# Altium PCB FlybackPCB.PcbDoc
Units mm, origin at the board's own origin, x right, y up, seen from the top; angles counter-clockwise.
Board outline 80 x 52 mm, 2 copper layers (Top Layer, Bottom Layer); 24 components, 15 nets, 77 pads, 0 vias.
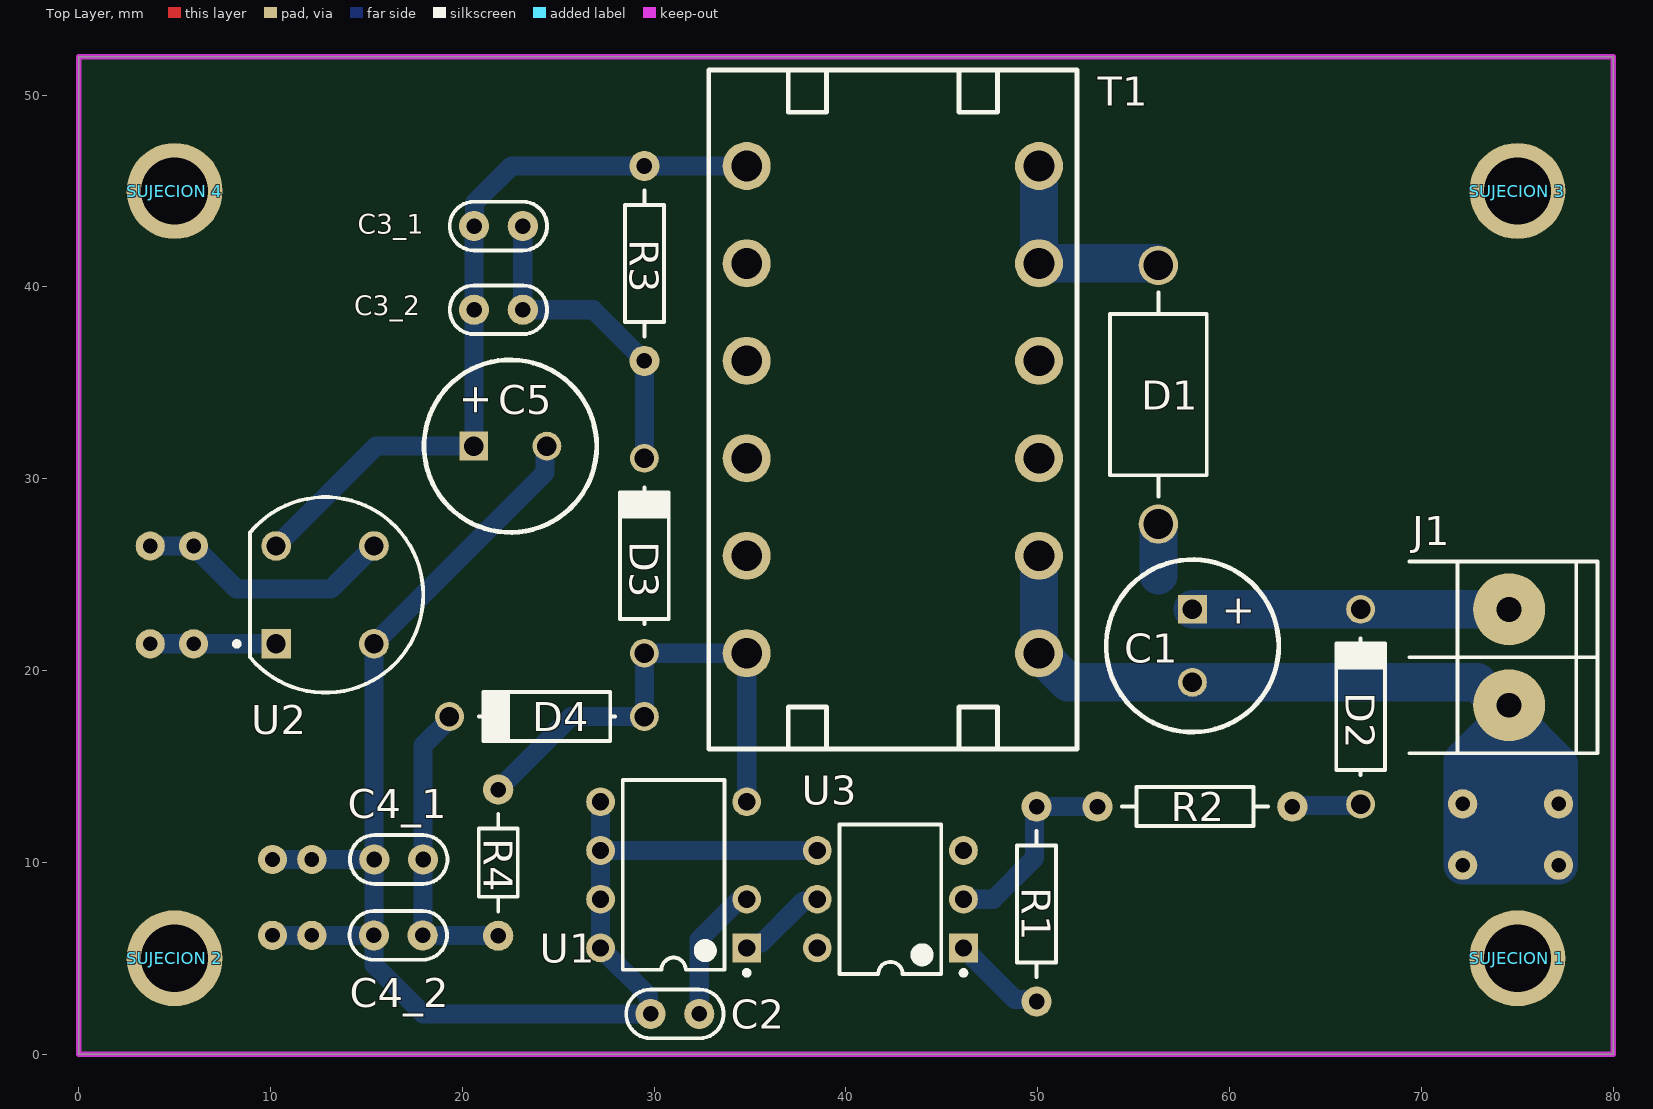
[diagram p0: Top Layer view]
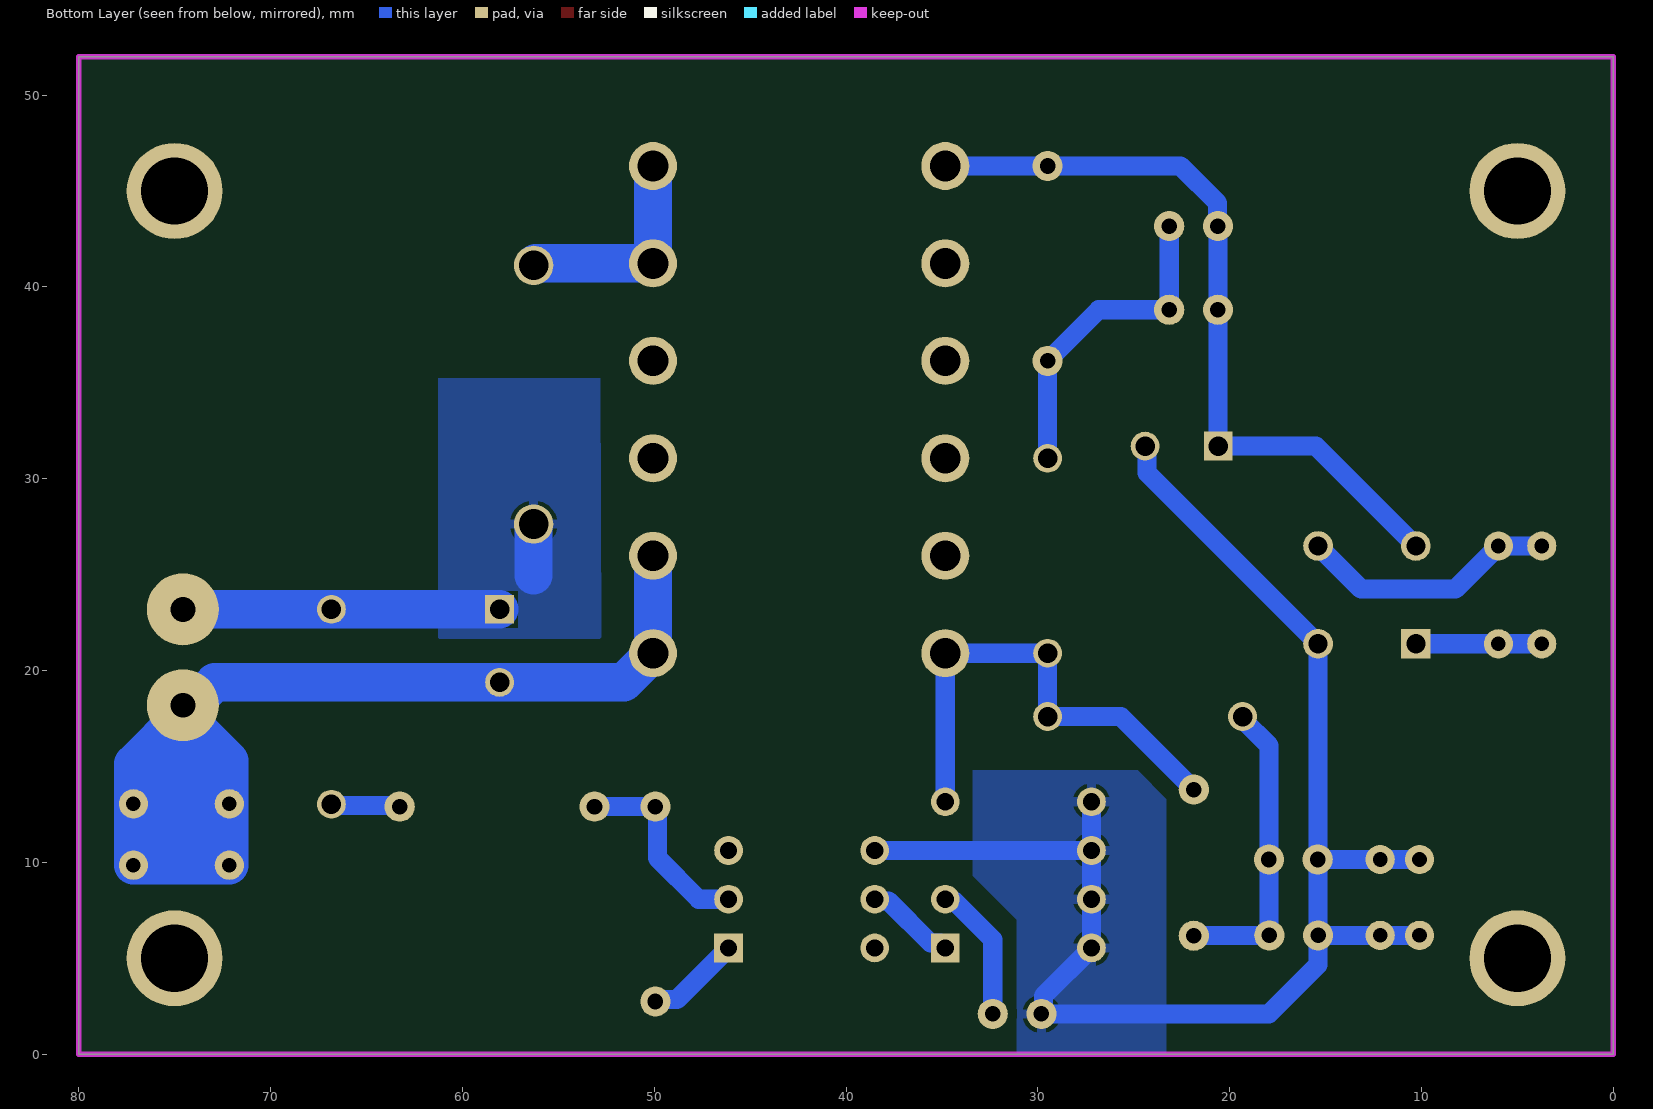
[diagram p1: Bottom Layer view, seen from below]
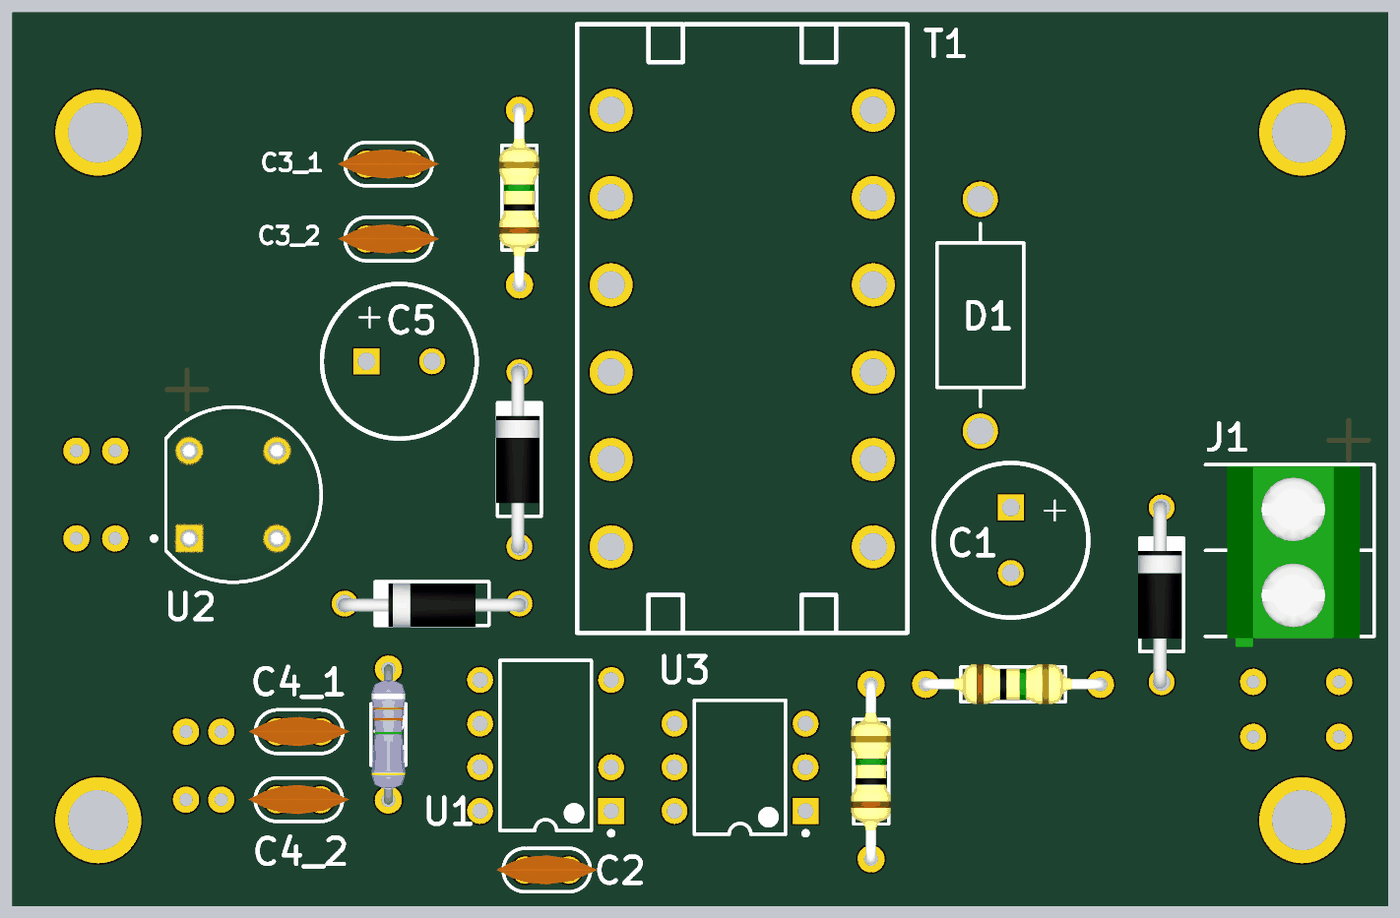
[diagram p2: 3D render of the assembled board from above, using the file's embedded part models]

## Layer stack, top to bottom
Top Solder: solder mask 0.0102, Solder Resist, Dk 3.5
Top Layer: signal copper 0.0356
Dielectric 1: dielectric 0.32, FR-4, Dk 4.8
Bottom Layer: signal copper 0.0356
Bottom Solder: solder mask 0.0102, Solder Resist, Dk 3.5

## Board outline
0,0 0,52 80,52 80,0

## Design rules (kind name [scope] priority, off if disabled: settings)
Clearance [All] p1: gap=0.5 ignorepadtopadclearanceinfootprint=FALSE
HoleSize [All] p1: absolutevalues=TRUE maxlimit=5 minlimit=0.025 maxpercent=80.000 minpercent=20.000
PlaneClearance [All] p1: clearance=1
PlaneConnect [All] p1: planeconnectstyle=Relief reliefexpansion=0.5 reliefentries=4 reliefconductorwidth=1 reliefairgap=0.2
PolygonConnect [All] p1: connectstyle=Relief reliefconductorwidth=0.5 reliefentries=4 polygonreliefangle="90 Angle" airgapwidth=0.2
RoutingVias [All] p1: holewidth=0.711 width=1.27 viastyle="Through Hole" minholewidth=0.711 minwidth=1.27 maxholewidth=0.711 maxwidth=1.27
SolderMaskExpansion [All] p1: expansion=0.102 istentingtop=FALSE
UnRoutedNet [All] p1: checkbadconnections=TRUE
Width [All] p1: maxlimit=2 minlimit=0.3 preferedwidth=1
26 further rules are at their usual default settings.

## Components (designator, comment, footprint, x,y, rotation, side; value= is the part's Value field where it differs from the comment)
C1 "CAPPOL" CAP300RP 58.063,21.287 r270 top
C2 "1uF" CAP100 31.08,2.1 r0 top
C3_1 "CAP" CAP100 21.88,43.172 r0 top
C3_2 "CAP" CAP100 21.882,38.81 r0 top
C4_1 "470p" CAP100 16.68,10.15 r0 top
C4_2 "CAP" CAP100 16.659,6.193 r0 top
C5 "1mF 400V" CAP300RP 22.503,31.701 r0 top
D1 "MUR405" ONSC-AXIAL_LEAD-2-267-05_V 56.285,34.382 r90 top
D2 "4.3V" DO41 66.826,18.112 r90 top
D3 "DIODO" DO41 29.488,25.986 r90 top
D4 "DIODO" DO41 24.408,17.604 r180 top
J1 "BORNERA 2" BORNERA2 74.573,20.692 r180 top
R1 "1k" RES400 49.935,2.745 r90 top
R2 "220" RES400 53.11,12.905 r0 top
R3 "RES" RES400 29.488,36.146 r90 top
R4 "4k7" RES300 21.868,13.794 r270 top
"SUJECION 1" "SUJECION" "SUJECION (5.00MM - 3.50MM)" 75,5 r90 top
"SUJECION 2" "SUJECION" "SUJECION (5.00MM - 3.50MM)" 5,5 r90 top
"SUJECION 3" "SUJECION" "SUJECION (5.00MM - 3.50MM)" 75,45 r90 top
"SUJECION 4" "SUJECION" "SUJECION (5.00MM - 3.50MM)" 5,45 r90 top
T1 "Ferrite Core Epcos E 30/15/7" "Ferrite Core Epcos E 30_15_7-Footprint-1" 32.842,51.306 r270 top
U1 "TNY290PG" PI-DIP-8C-7 31.012,9.349 r180 top
U2 "2W10G-E4/51" FP-WOG-MFG 13.351,23.944 r90 top value=20pF
U3 "4N35" LTST-DIP-6_A 42.315,8.079 r180 top

## Footprints (in the part's own frame and the unit in brackets; to place one, negate y for a bottom-side part, rotate by r counter-clockwise, add the part's x,y. Pads: shape width x height; smd on the part's side, far side on the other; paste and mask are expansions set on the pad)
BORNERA2 [mm] "Bornera con Tornillos 5mm separación"
  round 3.75 hole 1.3: 1(0,2.5) 2(0,-2.5)
  silkscreen extent -4.6,-5 5.2,5, body extent -3.76,-4.89 3.94,5.61, height 10
CAP100 [mil]
  round 62 hole 32: 1(-50,0) 2(50,0)
  silkscreen extent -100,-50 100,50, body extent -115,-33 115,34, height 241
CAP300RP [mm]
  rect 1.5x1.5 hole 1.016: 1(-1.905,0)
  round 1.5 hole 1.016: 2(1.905,0)
  silkscreen extent -4.5,-4.5 4.5,4.5
DO41 [mm]
  round 1.5 hole 1.016: 1(-5.08,0) 2(5.08,0)
  silkscreen extent -3.56,-1.27 3.56,1.27, body extent -5.46,-1.19 5.46,1.37, height 2.03
"Ferrite Core Epcos E 30_15_7-Footprint-1" [mm]
  round 2.5 hole 1.6: 1_1(5,1.98) 1_2(10.08,1.98) 1_3(15.16,1.98) 1_4(20.24,1.98) 1_5(25.32,1.98) 1_6(30.4,1.98) 2_1(5,17.22) 2_2(10.08,17.22) 2_3(15.16,17.22) 2_4(20.24,17.22) 2_5(25.32,17.22) 2_6(30.4,17.22)
  silkscreen extent 0,0 35.4,19.2
FP-WOG-MFG [mm]
  rect 1.55x1.55 hole 1 paste-1000 mask+0: 1(-2.55,3.06)
  round 1.55 hole 1 paste-1000 mask+0: 2(2.55,3.06) 3(-2.55,-2.04) 4(2.55,-2.04)
  silkscreen extent -5.1,-4.61 5.1,5.23, body extent -5.03,-4.52 5.03,4.52, height 0.25
LTST-DIP-6_A [mm] "DIP, 6-Leads, Body 7.8x7mm, Pitch 2.54mm"
  rect 1.5x1.5 hole 0.9: 1(-3.81,2.54)
  round 1.5 hole 0.9: 2(-3.81,0) 3(-3.81,-2.54) 4(3.81,-2.54) 5(3.81,0) 6(3.81,2.54)
  silkscreen extent -3.94,-3.9 2.65,3.96, body extent -3.95,-3.9 3.95,3.9, height 4.5
ONSC-AXIAL_LEAD-2-267-05_V [mm] "AXIAL, 2-Leads, Diameter 5.05mm"
  round 2.05 hole 1.55: 1(-6.745,0) 2(6.745,0)
  silkscreen extent -5.32,-2.52 5.32,2.52
PI-DIP-8C-7 [mm] "DIP, 7-Leads, Body 9.85x6.6mm, Pitch 2.54mm"
  rect 1.5x1.5 hole 0.9: 1(-3.81,3.81)
  round 1.5 hole 0.9: 2(-3.81,1.27) 4(-3.81,-3.81) 5(3.81,-3.81) 6(3.81,-1.27) 7(3.81,1.27) 8(3.81,3.81)
  silkscreen extent -3.94,-4.95 2.65,5.23, body extent -3.95,-4.92 3.95,4.92, height 4.06
RES300 [mil]
  round 62 hole 32: 1(0,0) 2(300,0)
  silkscreen extent 50,-40 250,40, body extent -10,-38 310,38, height 79
RES400 [mil]
  round 62 hole 32: 1(0,0) 2(400,0)
  silkscreen extent 50,-40 350,40, body extent -12,-45 412,46, height 96
"SUJECION (5.00MM - 3.50MM)" [mm]
  round 5 hole 3.5: 1(0,0)

## Part data
C2 C4_1: library part CAP
C5: library part CAPPOL
D1: library part CMP-0902-00022-1, "SWITCHMODE(TM) Power Rectifier, 2-Pin Axial_Lead, Pb-Free, Bulk Bag", Manufacturer="On Semiconductor", ComponentLink1Description="Manufacturer URL", ComponentLink1URL=http://www.onsemi.com/, ComponentLink2Description=Datasheet, ComponentLink2URL=http://www.onsemi.cn/pub_link/Collateral/MUR420-D.PDF, ComponentLink3Description="Package Specification", ComponentLink3URL=http://www.onsemi.com/pub_link/Collateral/267-05.PDF, DatasheetVersion="Rev. 15", IFSM Max (A)=125, Mounting Technology="Through Hole", PackageDescription="2-Pin, Axial Lead, Diameter 5.05 mm", PackageReference=AXIAL_LEAD-2-267-05, PackageVersion="Rev. G, 06/2000", Packing="Bulk Bag", PartNumber=MUR405, RoHS=TRUE, Type=Ultrafast, VRRM Max (V)=50
D2: library part "DIODO ZENER"
R1 R2 R4: library part RES
T1: library part CMP-012-00000-4, "Ferrite Core E Core 30mm 7.3mm 15.2mm General Application"
U1: library part CMP-2000-05302-1, "Energy-Efficient, Off-Line Switcher with Enhanced Flexibility and Extended Power Range, 23.5 W, -40 to 150 degC, 7-Pin DIP-8C, Pb-Free", Input / Supply Voltage - Max=265VAC, Input / Supply Voltage - Min=85VAC, Manufacturer=PowerIntegrations, Operating Supply Current=365uA, Operating Temperature Range=-40Cto+150C, Output Power=18W, Output Voltage=12V, Package / Case=DIP-8, Switching Frequency=132kHz, Brand=PowerIntegrations, Datasheet URL=http://www.mouser.com/ds/2/328/tny274-280-4065.pdf, Datasheet Version="Rev. I , 01/2009", Duty Cycle - Max=65%, Manufacturer URL=https://www.power.com/, Mounting Style=ThroughHole, Number of Outputs=1Output, Packaging=Tube, Product Category=AC/DCConverters, RoHS=True, Series=TNY277, Tradename=TinySwitch, Type=OffLineSwitcher, Unit Weight=0.080001oz
U2: library part CMP-02540-000015-1, "BRIDGE RECT 1PHASE 1KV 2A WOG", Capacitance=20pF, Forward Current=2A, Manufacturer=Vishay, Max Junction Temp=+150°C, Max Repetitive Reverse Voltage=1000V, Max Surge Forward Current=60A, Package=WOG, Peak Reverse Current=5uA, Temperature="-55°C to +150°C", Temperature Range Low=-55°C, Automotive=No, Category=Diode, ComponentLink2Description=Datasheet, ComponentLink2URL=http://www.vishay.com/docs/88528/2w005g.pdf, Device Class L1="Discrete Semiconductors", Device Class L2=Diodes, Device Class L3="Rectifier Diodes", Digikey Description="BRIDGE RECT 1PHASE 1KV 2A WOG", Height=5.6mm, Lead Free=Yes, Manufacturer Part Number=2W10G-E4/51, Mouser Description="Bridge Rectifiers 2.0 Amp 1000 Volt", Octopart=https://octopart.com/2w10g-e4%2F51-vishay-42173035, Reverse Voltage=1000V, RoHS=TRUE, Temperature Range High=+150°C
U3: library part CMP-2000-05615-1, "Photocoupler - Phototransistor Output, 1500 Vrms, -55 to 100 degC, 6-Pin DIP, RoHS, Tube", Current Transfer Ratio=50%, Forward Current=60mA, Isolation Voltage=5000Vrms, Manufacturer=Vishay, Maximum Collector Current=100mA, Maximum Collector Emitter Voltage=30V, Maximum Forward Diode Voltage=1.5V, Maximum Operating Temperature=+100C, Maximum Power Dissipation=70mW, Maximum Reverse Diode Voltage=6V, Minimum Operating Temperature=-55C, Package / Case=PDIP-6, Package Description="6-Pin Double In-line Package, Body 7.3 x 6.5 mm, Pitch 2.54 mm", Package Reference=DIP-6, Brand=VishaySemiconductors, Configuration=1Channel, Datasheet URL=http://optoelectronics.liteon.com/upload/download/DS-70-99-0012/S_110_4N3X%20Series%201115.pdf, Datasheet Version="Rev. D, 12/2015", Factory Pack Quantity=3000, Input Type=DC, Manufacturer URL=http://www.us.liteon.com/, Maximum Input Diode Current=60mA, Mounting Technology=ThroughHole, Number of Channels=1Channel, Number of Channels per Chip=1Channel, Output Device=NPNPhototransistor, Output Type=DC, Packaging=Tube, Product Category=TransistorOutputOptocouplers, RoHS=Details

## Free pads (board coordinates)
  round 1.524 hole 0.762: 16(3.727,26.494) 17(5.985,26.494) 18(3.727,21.394) 19(5.985,21.394) 20(10.1,6.193) 20(12.15,6.193) 21(10.1,10.15) 21(12.15,10.15) 22(72.15,13.05) 23(77.15,13.05) 24(72.15,9.85) 25(77.15,9.85)

## Nets (pads, with @x,y where several pads share a name; then routed paths per layer and width w, separated by ;. In a path a pad name is that pad's centre, name@x,y a point inside that pad or via, vN(x,y) a via of type N, cw(c..) or ccw(c..) an arc to the next point about the centre after c; other vN are vias at no path point)
GND: C2.1 C4_1.1 C4_2.1 C5.2 pad.20 pad.21 U1.5 U1.6 U1.7 U1.8 U2.3 U3.4 | length 80.3
  Bottom Layer w1: pad.20@10.1,6.193 12.15,6.193 C4_2.1 ; pad.21@10.1,10.15 12.15,10.15 C4_1.1 ; C5.2 24.312,31.605 24.312,30.315 U2.3 15.401,21.384 15.401,10.159 C4_1.1 ; U1.5 U1.6 ; U3.4 U1.6 ; C4_2.1 15.389,4.661 17.95,2.1 C2.1 29.7,2.21 29.7,3.041 U1.8 U1.7 U1.6 ; C4_2.1 15.399,6.204 15.399,10.139 C4_1.1
NetC1_2: C1.2 J1.1 pad.22 pad.23 pad.24 pad.25 T1.2_5 T1.2_6 | length 54
  Bottom Layer w2: T1.2_5 T1.2_6 51.586,19.382 C1.2 72.909,19.382 74.099,18.192 J1.1 J1.1@74.573,17.718 ; J1.1@74.573,17.718 77.15,15.141 pad.23 pad.25 pad.24 pad.22 72.15,15.295 J1.1@74.573,17.718
NetC2_2: C2.2 U1.2 | length 7.3
  Bottom Layer w1: C2.2@32.387,2.137 C2.2 32.35,5.981 34.352,7.983 34.726,7.983 U1.2
NetC3_1_2: C3_1.2 C3_2.2 D3.2 R3.1 | length 16.9
  Bottom Layer w1: C3_1.2 23.151,43.171 23.151,38.811 C3_2.2 26.824,38.81 R3.1 D3.2
NetC4_1_2: C4_1.2 C4_2.2 D4.2 R4.2 | length 15.9
  Bottom Layer w1: D4.2 19.328,17.469 17.95,16.091 C4_1.2 17.939,10.139 17.939,6.204 C4_2.2 17.938,6.184 21.858,6.184 R4.2
NetD1_2: D1.2 T1.2_1 T1.2_2 | length 11.3
  Bottom Layer w2: T1.2_1 T1.2_2 56.172,41.226 56.271,41.127 D1.2
NetD2_1: D2.1 R2.2 | length 3.6
  Bottom Layer w1: R2.2 63.334,12.968 66.763,12.968 D2.1
NetD3_1: D3.1 D4.1 R4.1 T1.1_6 U1.4 | length 25.6
  Bottom Layer w1: R4.1 25.678,17.604 D4.1 D3.1 T1.1_6 U1.4
NetR1_1: R1.1 U3.1 | length 5
  Bottom Layer w1: U3.1 48.809,2.855 49.825,2.855 R1.1
NetR1_2: R1.2 R2.1 U3.2 | length 10.5
  Bottom Layer w1: U3.2 47.679,8.079 49.825,10.225 49.825,12.795 R1.2 R2.1
NetU1_1: U1.1 U3.5 | length 4.7
  Bottom Layer w1: U1.1 35.072,5.789 35.589,5.789 37.783,7.983 38.409,7.983 U3.5
VAC_1: pad.18 pad.19 U2.1 | length 6.6
  Bottom Layer w1: pad.18 pad.19 U2.1
VAC_2: pad.16 pad.17 U2.4 | length 13.5
  Bottom Layer w1: pad.16 pad.17 8.229,24.25 13.147,24.25 U2.4
VCC: C3_1.1 C3_2.1 C5.1 R3.2 T1.1_1 U2.2 | length 40.1
  Bottom Layer w1: U2.2 15.498,31.701 C5.1 20.605,31.708 20.605,38.803 C3_2.1 20.611,38.811 20.611,43.171 C3_1.1 20.633,43.196 20.633,44.383 22.556,46.306 R3.2 T1.1_1
Vout: C1.1 D1.1 D2.2 J1.2 | length 19.2
  Bottom Layer w2: D1.1 56.295,27.627 56.295,24.96 ; C1.1 D2.2 J1.2
pads on no net: "SUJECION 1.1" "SUJECION 2.1" "SUJECION 3.1" "SUJECION 4.1" T1.1_2 T1.1_3 T1.1_4 T1.1_5 T1.2_3 T1.2_4 U3.3 U3.6

## Polygon pours and split planes (outlines as drawn)
Vout on Bottom Layer "NONET_L-01_P-001" (solid, pour order 1): 52.8,35.25 61.25,35.25 61.25,21.7 61.2,21.65 52.75,21.65
GND on Bottom Layer "NONET_L-01_P-001" (solid, pour order 0): 31.1,0 31.1,7 33.4,9.3 33.4,14.8 24.8,14.8 23.3,13.3 23.3,0

## Keep-outs
Keep-Out Layer:
  the board outline again, w0.3

## Other copper
Bottom Layer:
  rectangle net NetC1_2: 72.15,9.85 76.6,16.5
Multi-Layer:
  text "+" at 8.1,28.9 h3
  text "+" at 75.65,25.95 h3

## Text inside footprints (layer, text, board x,y; h text height)
C1: Top Overlay "+" at 59.587,22.43 h1.52
C5: Top Overlay "+" at 21.36,33.225 h1.52 r90